# EAGLE board CAN_node_analog_2 (EAGLE 7.2.0)
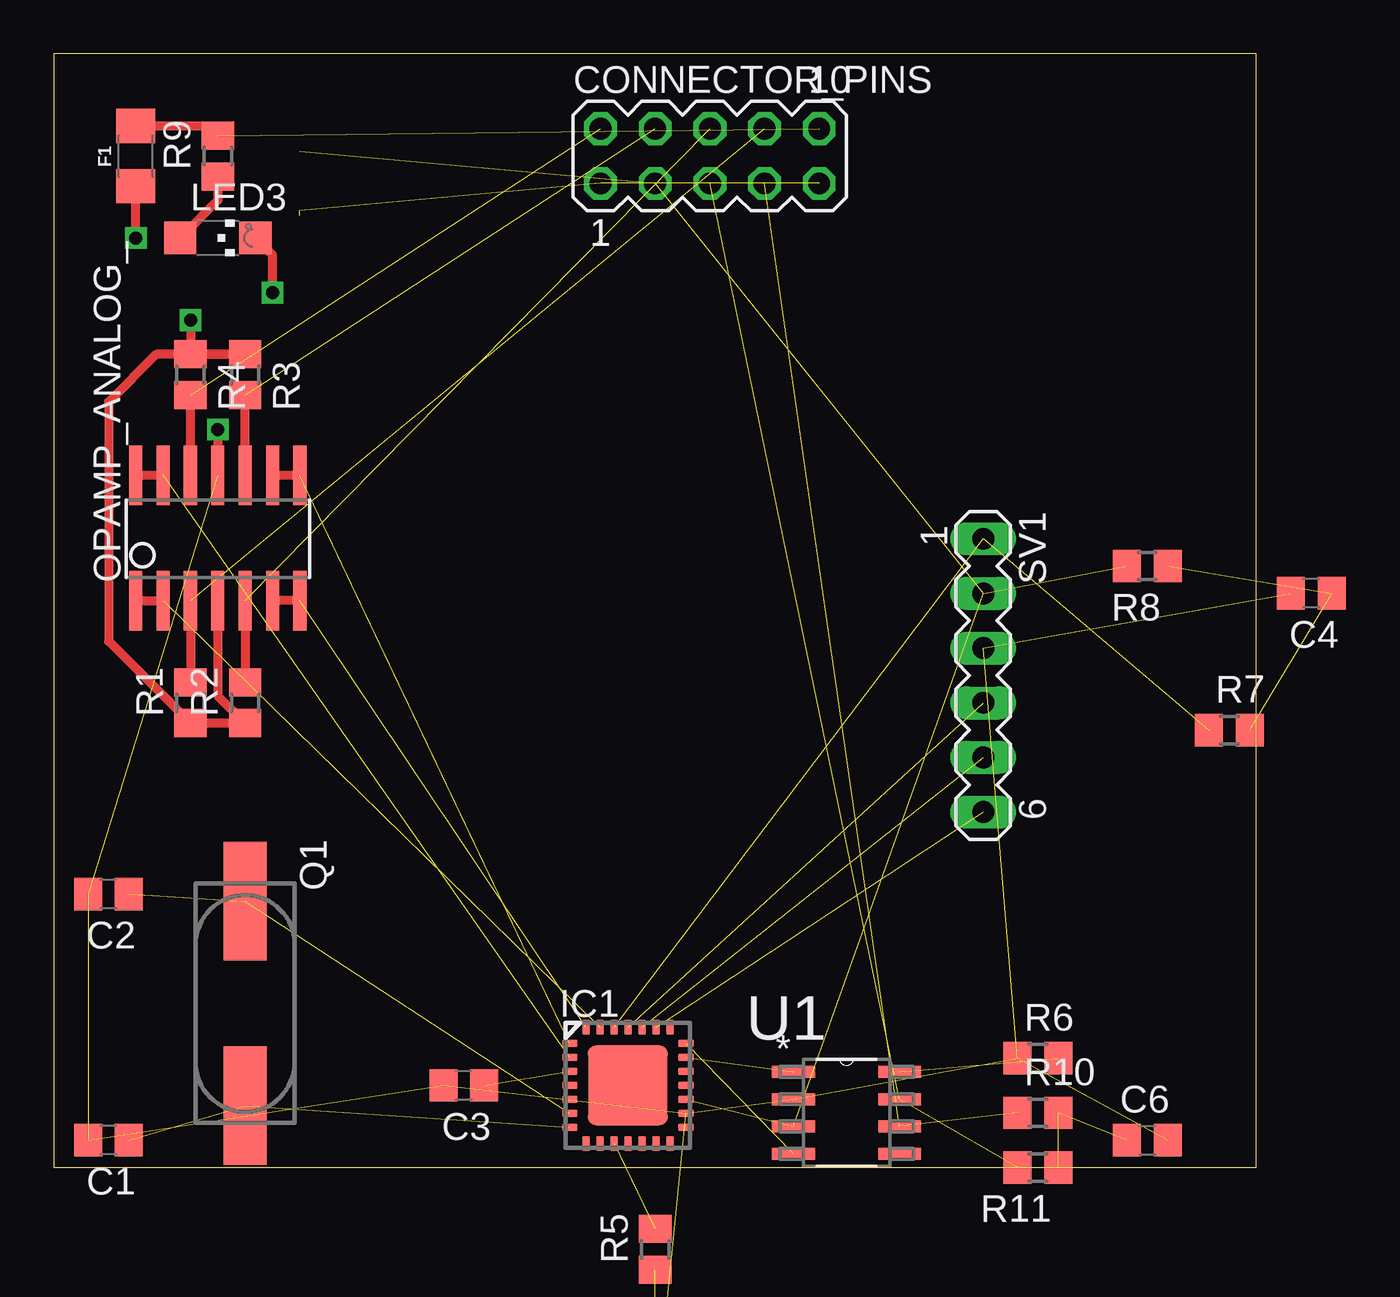
[diagram p0: board, top side]
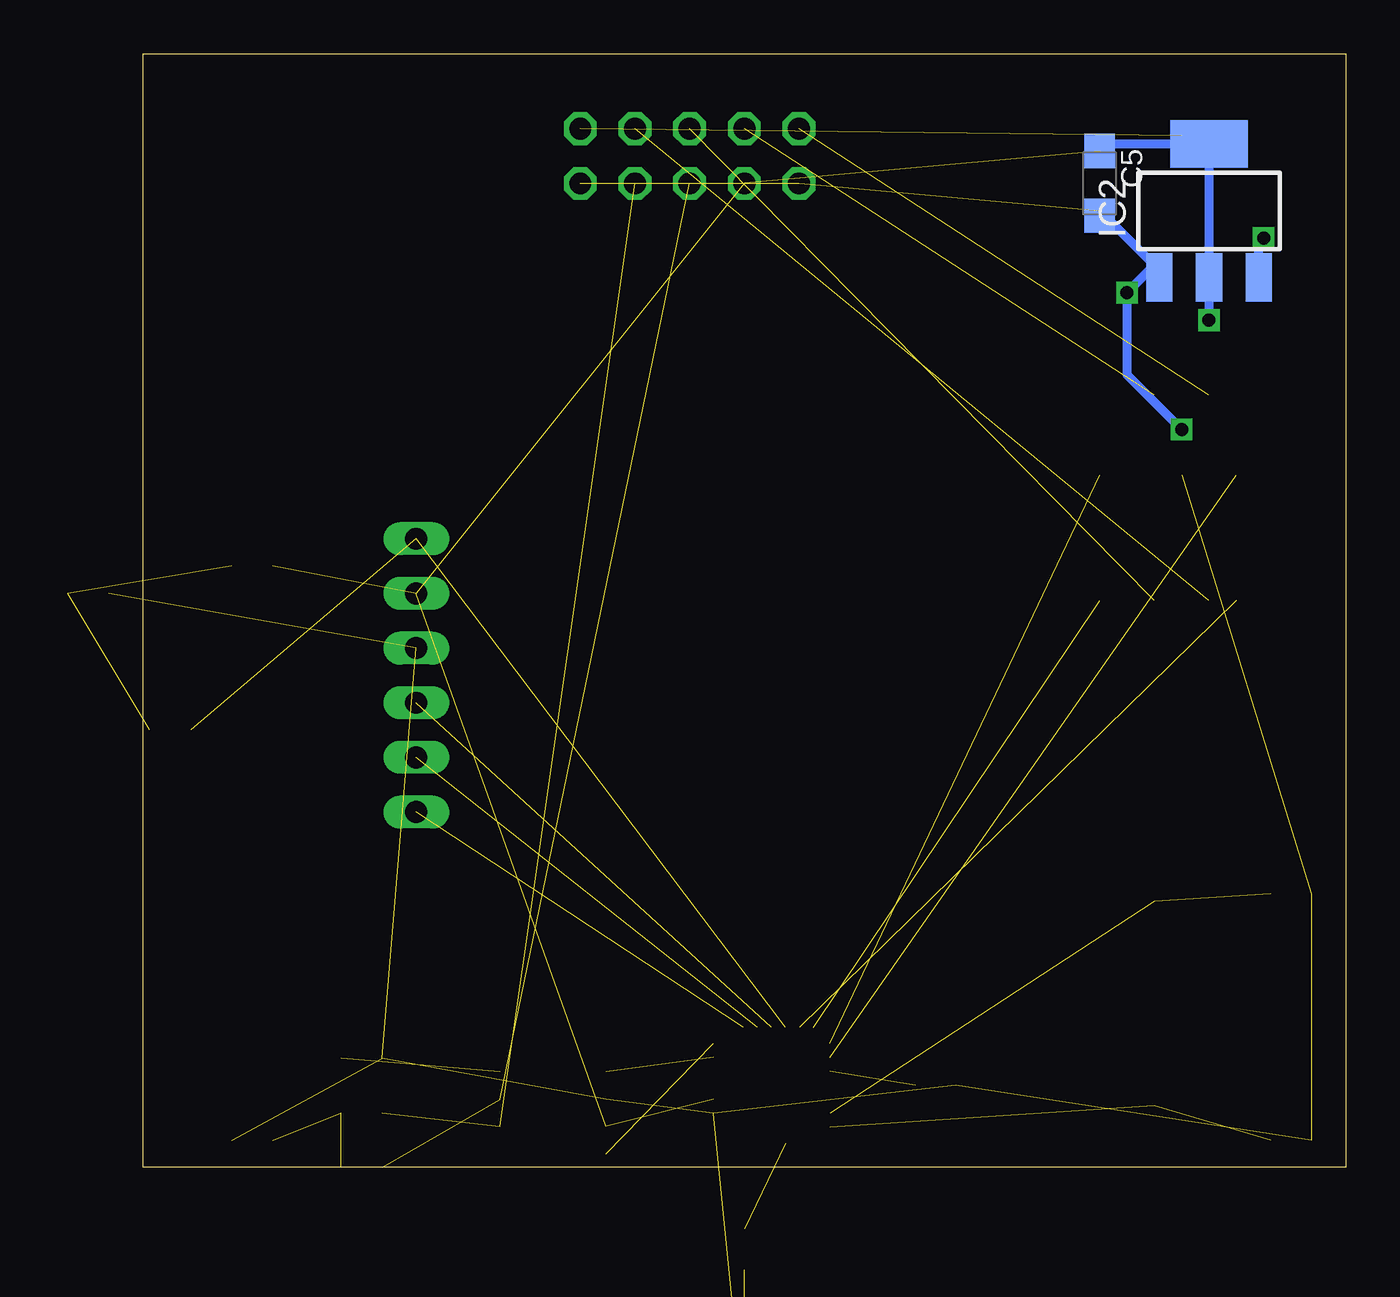
[diagram p1: board, bottom side, seen from below]

Size 55.86 x 51.74 mm. Coordinates in mm from the lower left corner, seen from the top.
Outline: 0,0 55.86,0 55.86,51.74 0,51.74 0,0
Copper layers (1*16): Top 0.035mm / dielectric 1.5mm / Bottom 0.035mm
Design rules "default": minimum track width 10mil, minimum drill 24mil, track to track 8mil, track to pad 8mil, pad to pad 8mil, via to via 8mil, smd to smd 8mil, copper to edge 40mil, drill to drill 8mil, minimum pad ring 10mil, minimum via ring 8mil, stop-mask expansion 4mil, vias tented up to drill 0mil, thermal gap 10mil

## Footprints (pad centres in the part's own frame; a part is rotated, then mirrored left to right if it is on the bottom)
C0805 = smd 1.3 x 1.5: 1 -0.95,0; 2 0.95,0
SMC_A = smd 1.6 x 1.4: + -1.5,0; - 1.5,0
MA05-2 = drill 1.016 octagon: 1 -5.08,-1.27; 2 -5.08,1.27; 3 -2.54,-1.27; 4 -2.54,1.27; 5 0,-1.27; 6 0,1.27; 7 2.54,-1.27; 8 2.54,1.27; 9 5.08,-1.27; 10 5.08,1.27
1206 = smd 1.6 x 1.8: 1 -1.4,0; 2 1.4,0
MICROCHIP_QFN28-ML_6X6MM = smd 0.7 x 0.35: 1 -2.7,1.95; 2 -2.7,1.3; 3 -2.7,0.65; 4 -2.7,0; 5 -2.7,-0.65; 6 -2.7,-1.3; 7 -2.7,-1.95; 15 2.7,-1.95; 16 2.7,-1.3; 17 2.7,-0.65; 18 2.7,0; 19 2.7,0.65; 20 2.7,1.3; 21 2.7,1.95 | smd 0.35 x 0.7: 8 -1.95,-2.7; 9 -1.3,-2.7; 10 -0.65,-2.7; 11 0,-2.7; 12 0.65,-2.7; 13 1.3,-2.7; 14 1.95,-2.7; 22 1.95,2.7; 23 1.3,2.7; 24 0.65,2.7; 25 0,2.7; 26 -0.65,2.7; 27 -1.3,2.7; 28 -1.95,2.7 | smd 3.7 x 3.7: EXP 0,0
SOT223 = smd 1.219 x 2.235: 1 -2.311,-3.099; 2 0,-3.099; 3 2.311,-3.099 | smd 3.6 x 2.2: TAB 0,3.099
CHIPLED_1206 = smd 1.5 x 1.5: A 0,-1.75; C 0,1.75
ADWAITFS_SO14_LONGPADS = smd 0.61 x 2.762: 1 -6.35,-1.61; 2 -5.08,-1.61; 3 -3.81,-1.61; 4 -2.54,-1.61; 5 -1.27,-1.61; 6 0,-1.61; 7 1.27,-1.61; 8 1.27,4.226; 9 0,4.226; 10 -1.27,4.226; 11 -2.54,4.226; 12 -3.81,4.226; 13 -5.08,4.226; 14 -6.35,4.226
CSM-7X-DU = smd 5.5 x 2: 1 -4.75,0; 2 4.75,0
R0805 = smd 1.3 x 1.5: 1 -0.95,0; 2 0.95,0
MA06-1 = drill 1.016 long: 1 -6.35,0; 2 -3.81,0; 3 -1.27,0; 4 1.27,0; 5 3.81,0; 6 6.35,0
TEXAS-INSTRUMENTS_BY_ELEMENT14_BATCH_1_SOIC127P600X175-8N = smd 1.981 x 0.559: 1 -2.464,1.905; 2 -2.464,0.635; 3 -2.464,-0.635; 4 -2.464,-1.905; 5 2.464,-1.905; 6 2.464,-0.635; 7 2.464,0.635; 8 2.464,1.905

## Placement (x,y rotation side)
C1  22pF  [C0805]  2.54,1.27 180 top
C2  22pF  [C0805]  2.54,12.7 180 top
C3  10uF  [C0805]  19.05,3.81 180 top
C4  22pF  [C0805]  58.42,26.67 180 top
C5  [SMC_A]  11.43,45.72 270 bottom
C6  10uF  [C0805]  50.8,1.27 0 top
CONNECTOR_PINS  [MA05-2]  30.48,46.99 0 top
F1  6V/0.5A  [1206]  3.81,46.99 90 top
IC1  MICROCHIP_PIC18F2580-I/ML  [MICROCHIP_QFN28-ML_6X6MM]  26.67,3.81 0 top
IC2  LM1117IMPX-ADJ  [SOT223]  6.35,44.45 0 bottom
LED2  [CHIPLED_1206]  27.94,-10.16 180 top  (outside the outline)
LED3  [CHIPLED_1206]  7.62,43.18 270 top
OPAMP_ANALOG_  ADWAITFS_LMC6464  [ADWAITFS_SO14_LONGPADS]  10.16,27.94 0 top
Q1  CSM-7X-DU  [CSM-7X-DU]  8.89,7.62 270 top
R1  47k  [R0805]  6.35,21.59 90 top
R2  47k  [R0805]  8.89,21.59 90 top
R3  47k  [R0805]  8.89,36.83 270 top
R4  47k  [R0805]  6.35,36.83 270 top
R5  1k  [R0805]  27.94,-3.81 90 top
R6  4k7  [R0805]  45.72,5.08 0 top
R7  470  [R0805]  54.61,20.32 0 top
R8  10k  [R0805]  50.8,27.94 180 top
R9  1k  [R0805]  7.62,46.99 90 top
R10  60E  [R0805]  45.72,2.54 0 top
R11  60E  [R0805]  45.72,0 180 top
SV1  [MA06-1]  43.18,22.86 270 top
U1  TEXAS-INSTRUMENTS_BY_ELEMENT14_BATCH_1_SN65HVD1050D  [TEXAS-INSTRUMENTS_BY_ELEMENT14_BATCH_1_SOIC127P600X175-8N]  36.83,2.54 0 top

## Library data of the parts
C1-C4 C6 R1-R11 = resistor
C5 = rcl
CONNECTOR_PINS SV1 = con-lstb; OC_FARNELL: unknown; OC_NEWARK: unknown
F1 = sparkfun_fuses; PROD_ID: RES-08585
IC1 = IITBRacing_CAN_node_Evo5; MF: MICROCHIP; MPN: PIC18F2580-I/ML; OC_FARNELL: 1556180; OC_NEWARK: 71J7242
IC2 = lm1117
LED2 LED3 = led
OPAMP_ANALOG_ = IITBRacing_CAN_node_Evo5
Q1 = crystal; OC_FARNELL: unknown; OC_NEWARK: unknown
U1 = IITBRacing_CAN_node_Evo5; MPN: SN65HVD1050D; OC_FARNELL: 1220984; OC_NEWARK: 70K4439; PACKAGE: SOIC-8; SUPPLIER: Texas Instruments

## Nets
5V: C5.+ CONNECTOR_PINS.3 IC1.17 IC2.2 IC2.TAB OPAMP_ANALOG_.4 R1.1 R2.1 R3.1 R4.1 R8.2 SV1.2 U1.3
12V: CONNECTOR_PINS.10 F1.2 R9.2
ANALOG_1: CONNECTOR_PINS.8 OPAMP_ANALOG_.3 R1.2
ANALOG_2: CONNECTOR_PINS.6 OPAMP_ANALOG_.5 R2.2
ANALOG_3: CONNECTOR_PINS.4 OPAMP_ANALOG_.10 R3.2
ANALOG_4: CONNECTOR_PINS.2 OPAMP_ANALOG_.12 R4.2
ANALOG_IN_1: IC1.27 OPAMP_ANALOG_.1 OPAMP_ANALOG_.2
ANALOG_IN_2: IC1.28 OPAMP_ANALOG_.6 OPAMP_ANALOG_.7
ANALOG_IN_3: IC1.1 OPAMP_ANALOG_.8 OPAMP_ANALOG_.9
ANALOG_IN_4: IC1.2 OPAMP_ANALOG_.13 OPAMP_ANALOG_.14
CAN_H: CONNECTOR_PINS.5 R11.2 U1.7
CAN_L: CONNECTOR_PINS.7 R10.1 U1.6
CAN_RX: IC1.21 U1.4
CAN_TX: IC1.20 U1.1
GND: C1.2 C2.2 C3.2 C4.2 C5.- C6.2 CONNECTOR_PINS.1 CONNECTOR_PINS.9 IC1.16 IC2.1 LED2.C LED3.C OPAMP_ANALOG_.11 R6.1 SV1.3 U1.2
LED: IC1.10 R5.2
MCLR: IC1.26 R7.1 SV1.1
N$1: LED2.A R5.1
N$2: R6.2 U1.8
N$3: C4.1 R7.2 R8.1
N$4: F1.1 IC2.3
N$5: LED3.A R9.1
N$7: C6.1 R10.2 R11.1
OSC1: C2.1 IC1.6 Q1.1
OSC2: C1.1 IC1.7 Q1.2
PGC: IC1.24 SV1.5
PGD: IC1.25 SV1.4
PGM: IC1.23 SV1.6
VCAP: C3.1 IC1.3
VSS: IC1.5

## Tracks (layer width: path | path; a pad name or v marks a point on that pad's centre or on a via)
5V  (via drill 0.6)  (5 unrouted)
  Top 0.406: OPAMP_ANALOG_.4 7.62,21.91 R2.1 R1.1 2.54,24.45 2.54,35.56 4.76,37.78 R3.1 R4.1 v6.35,39.37
  Bottom 0.406: C5.+ 11.1,47.55 IC2.TAB IC2.2 v6.35,39.37
12V  (1 unrouted)
  Top 0.406: F1.2 7.17,48.39 R9.2
ANALOG_1  (1 unrouted)
  Top 0.406: OPAMP_ANALOG_.3 R1.2
ANALOG_2  (1 unrouted)
  Top 0.406: OPAMP_ANALOG_.5 R2.2
ANALOG_3  (1 unrouted)
  Top 0.406: OPAMP_ANALOG_.10 R3.2
ANALOG_4  (1 unrouted)
  Top 0.406: OPAMP_ANALOG_.12 R4.2
ANALOG_IN_1  (1 unrouted)
  Top 0.406: OPAMP_ANALOG_.1 OPAMP_ANALOG_.2
ANALOG_IN_2  (1 unrouted)
  Top 0.406: OPAMP_ANALOG_.7 OPAMP_ANALOG_.6
ANALOG_IN_3  (1 unrouted)
  Top 0.406: OPAMP_ANALOG_.9 OPAMP_ANALOG_.8
ANALOG_IN_4  (1 unrouted)
  Top 0.406: OPAMP_ANALOG_.14 OPAMP_ANALOG_.13
CAN_H  (2 unrouted)
CAN_L  (2 unrouted)
CAN_RX  (1 unrouted)
CAN_TX  (1 unrouted)
GND  (via drill 0.6)  (13 unrouted)
  Top 0.406: v10.16,40.64 10.16,42.39 LED3.C | v7.62,34.29 OPAMP_ANALOG_.11
  Bottom 0.406: IC2.1 8.66,41.68 | 8.66,41.68 11.43,44.45 | 8.66,41.68 9.12,41.68 v10.16,40.64 10.16,36.83 v7.62,34.29
LED  (1 unrouted)
MCLR  (2 unrouted)
N$1  (1 unrouted)
N$2  (1 unrouted)
N$3  (2 unrouted)
N$4  (via drill 0.6)
  Top 0.406: v3.81,43.18 F1.1
  Bottom 0.406: IC2.3 4.04,42.95 v3.81,43.18
N$5
  Top 0.406: R9.1 7.62,44.93 LED3.A
N$7  (2 unrouted)
OSC1  (2 unrouted)
OSC2  (2 unrouted)
PGC  (1 unrouted)
PGD  (1 unrouted)
PGM  (1 unrouted)
VCAP  (1 unrouted)